# Altium PCB FMC-320U-B0.PcbDoc
Units mil, origin at the board's own origin, x right, y up, seen from the top; angles counter-clockwise.
Board outline 3372.94 x 3385.83 mil, 2 copper layers (Top Layer, Bottom Layer), stack 65.8 mil thick; 25 components, 16 nets, 68 pads, 21 vias.
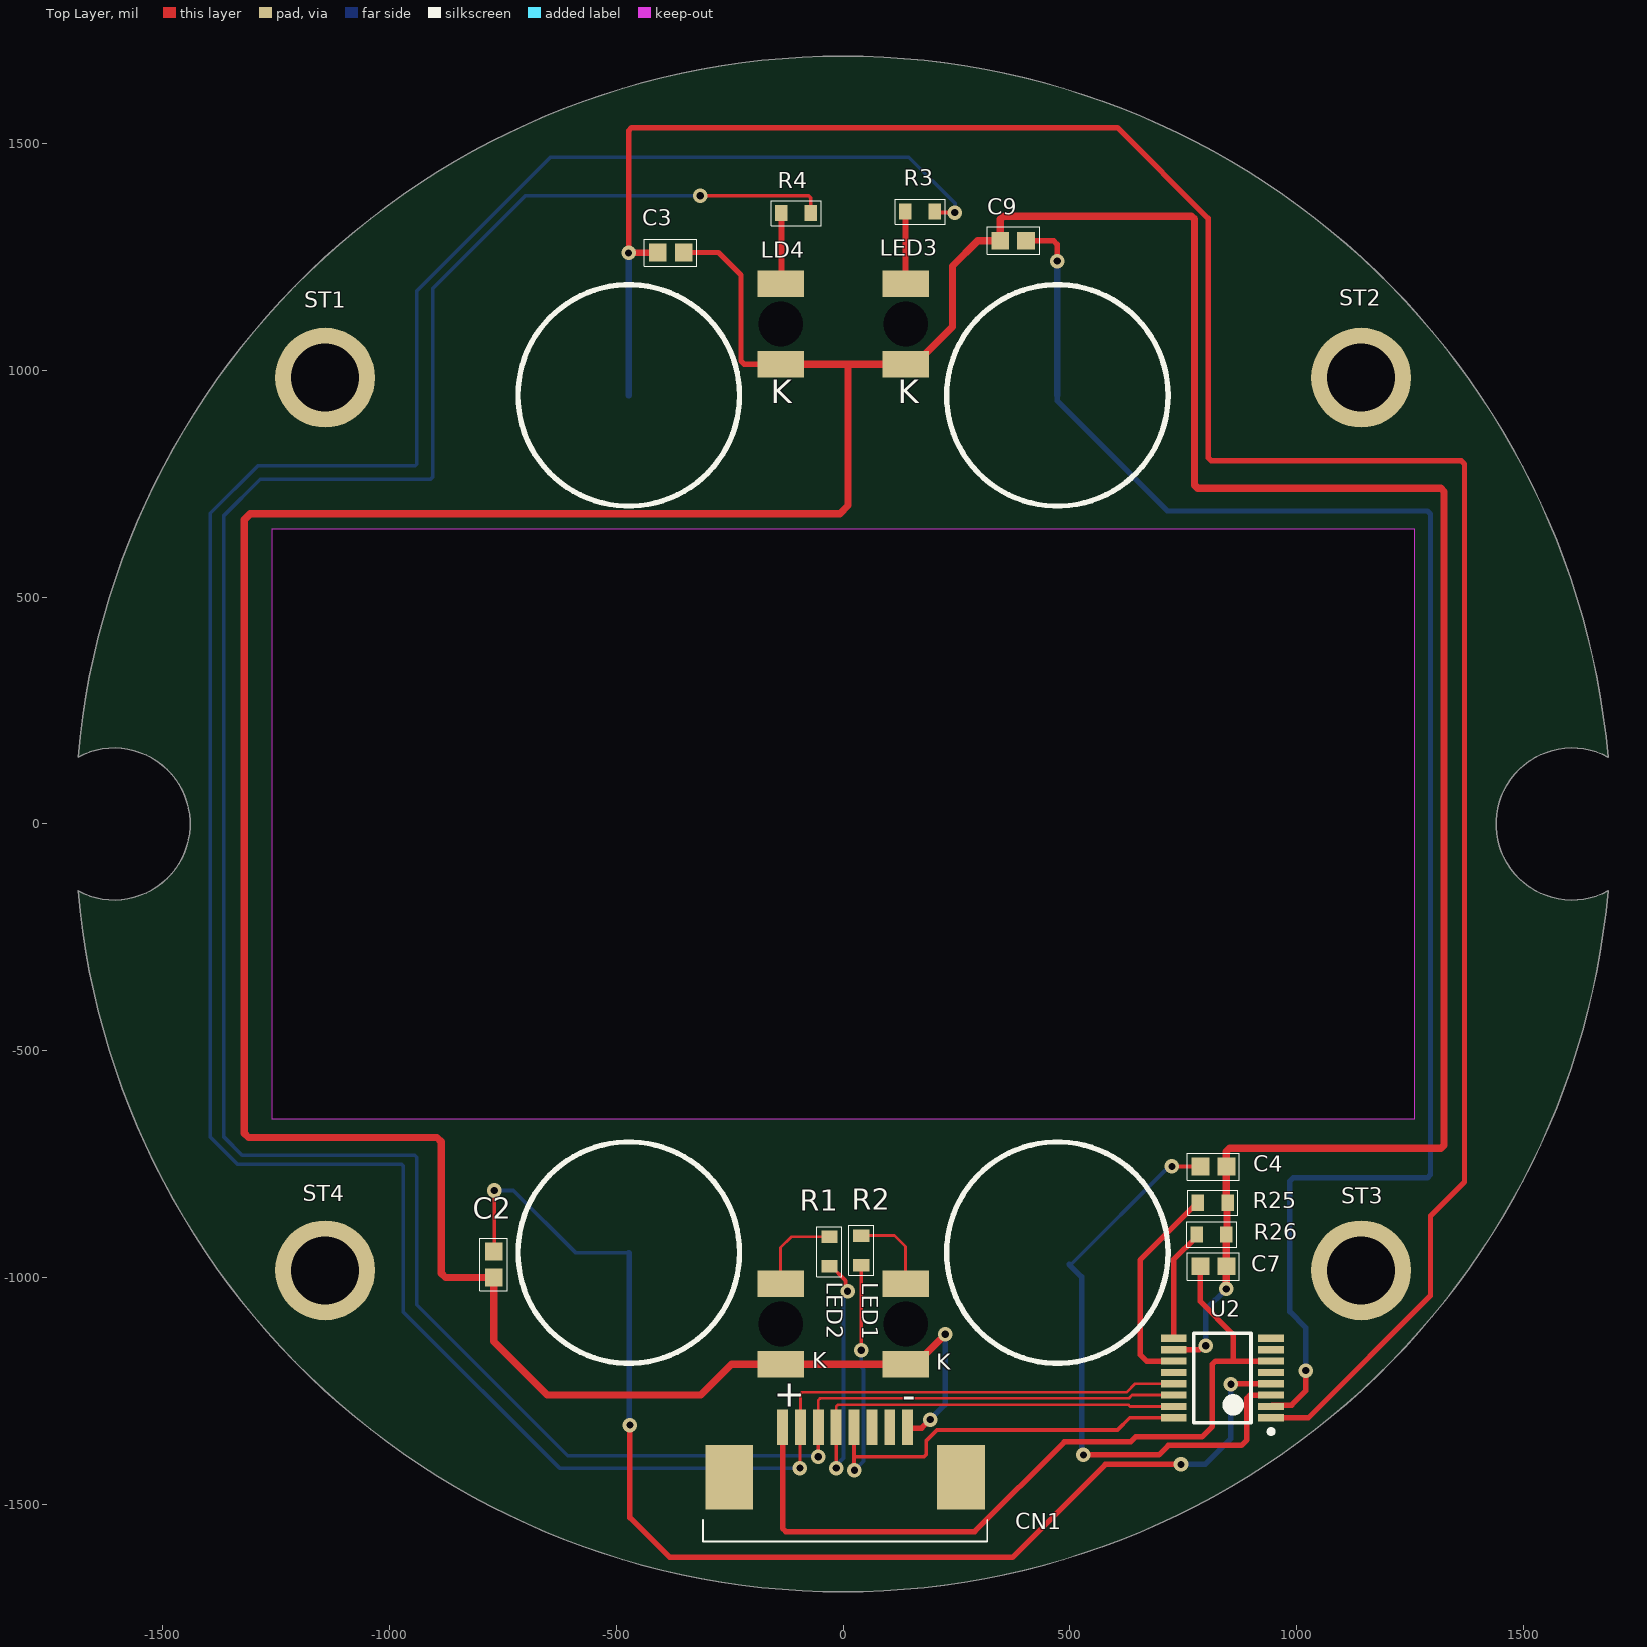
[diagram p0: Top Layer view]
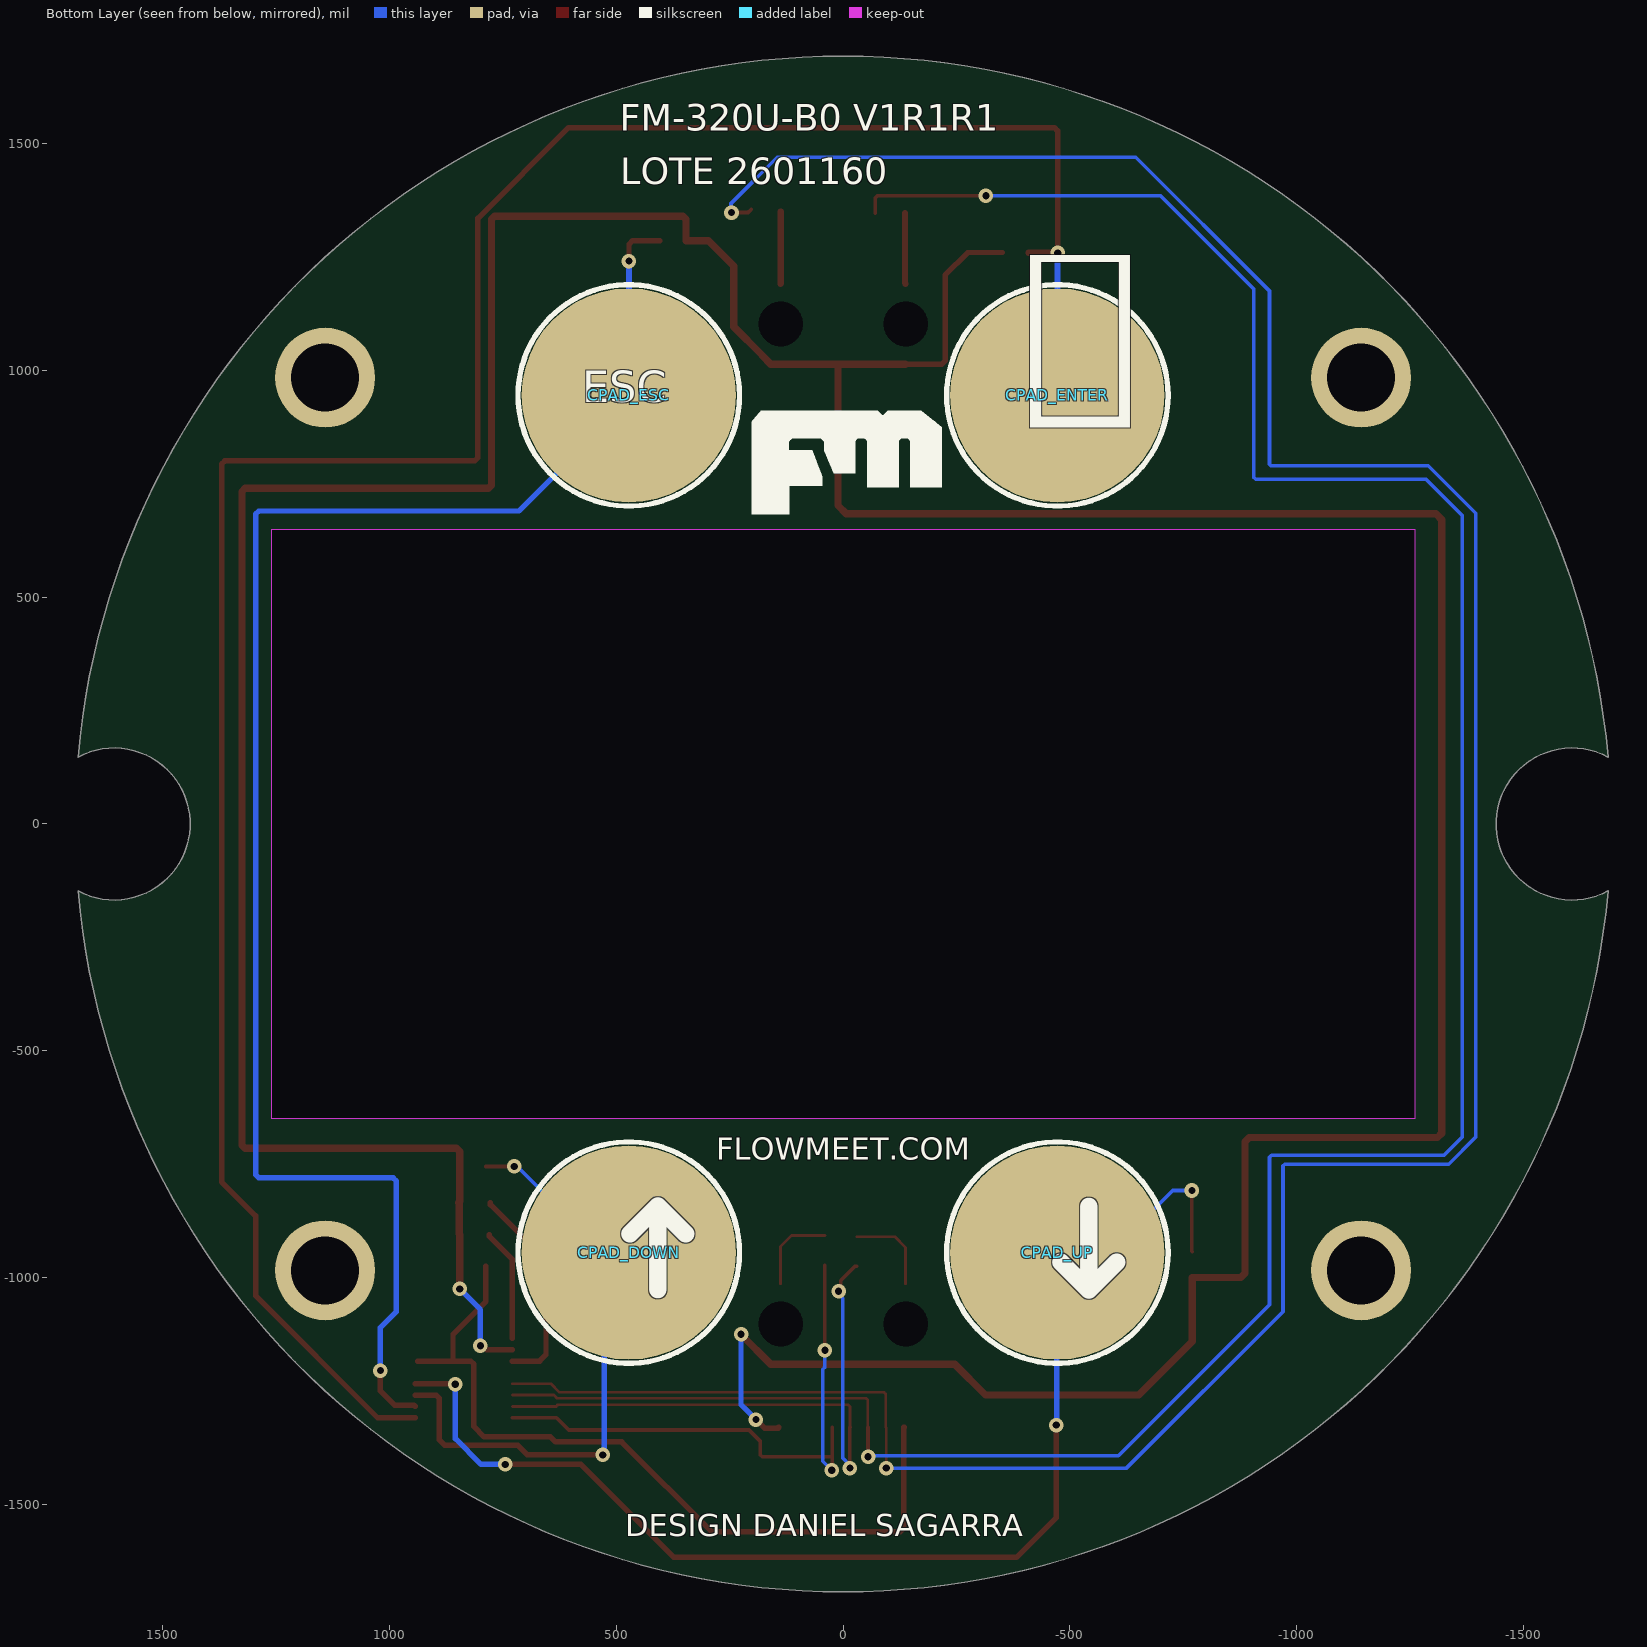
[diagram p1: Bottom Layer view, seen from below]

## Layer stack, top to bottom
Top Solder: solder mask 0.4, Solder Resist, Dk 3.5
Top Layer: signal copper 1.4
Dielectric 1: dielectric 63, FR-4, Dk 4.8
Bottom Layer: signal copper 1.4
Bottom Solder: solder mask 0.4, Solder Resist, Dk 3.5

## Board outline
-1686.47,-147.55 ccw(c0,0) 1686.47,-147.55 cw(c1607,0) 1686.47,147.55 ccw(c0,0) -1686.47,147.55 cw(c-1607,0)
cut-out: -1259.84,649.61 -1259.84,-649.61 1259.84,-649.61 1259.84,649.61

## Design rules (kind name [scope] priority, off if disabled: settings)
BoardOutlineClearance [NOT(InNamedUnion('Manufacturing Notes'))] p1: gap=20 ignorepadtopadclearanceinfootprint=FALSE except(50: SMDPad-OutlineEdge SMDPad-CavityEdge SMDPad-CutoutEdge SMDPad-SplitBarrior SMDPad-SplitContinuation THPad-OutlineEdge THPad-CavityEdge THPad-CutoutEdge THPad-SplitBarrior THPad-SplitContinuation)
Clearance [All] p1: gap=7 ignorepadtopadclearanceinfootprint=FALSE
HoleSize [All] p1: absolutevalues=TRUE maxlimit=236 minlimit=16 maxpercent=80.000 minpercent=20.000
HoleToHoleClearance [All] p1: gap=16 allowstackedmicrovias=TRUE
MinimumSolderMaskSliver [All] p1: minsoldermaskwidth=5
PolygonConnect [All] p1: connectstyle=Relief reliefconductorwidth=16 reliefentries=4 polygonreliefangle="90 Angle" airgapwidth=10
RoutingVias [All] p1: holewidth=16 width=32 viastyle="Through Hole" minholewidth=6 minwidth=12 maxholewidth=236 maxwidth=250
SilkToSolderMaskClearance [IsPad] p1: minsilkscreentomaskgap=6 clearancetoexposedcopper=TRUE
SolderMaskExpansion SolderMaskExpansion_Vias [IsVia] p1: expansion=-16 istentingtop=FALSE
SolderMaskExpansion [All] p2: expansion=2 istentingtop=FALSE
Width [All] p1: maxlimit=20 minlimit=4 preferedwidth=8
26 further rules are at their usual default settings.

## Classes and differential pairs
component class Interboard: CN1 ST1 ST2 ST3 ST4 ST11 ST12 ST13 ST14 W1

## Components (designator, comment, footprint, x,y, rotation, side; value= is the part's Value field where it differs from the comment)
C2 "27pF" CAP_SM0603_YAGEOCC2_N -770,-971.38 r90 top
C3 "27pF" CAP_SM0603_YAGEOCC2_N -380,1260 r180 top
C4 "27pF" CAP_SM0603_YAGEOCC2_N 816.38,-755 r180 top
C7 "100nF" CAP_SM0603_YAGEOCC2_N 816.38,-975 r180 top
C9 "27pF" CAP_SM0603_YAGEOCC2_N 375,1286 r0 top
CN1 "A10FC-S08FCA-H25" 849528 4.49,-1455.75 r0 top
CPAD_DOWN "DOWN" CAPACITIVE_PAD_12MM 472.44,-944.88 r180 bottom
CPAD_ENTER "ENTER" CAPACITIVE_PAD_12MM -472.44,944.88 r90 bottom
CPAD_ESC "ESC" CAPACITIVE_PAD_12MM 472.44,944.88 r180 bottom
CPAD_UP "UP" CAPACITIVE_PAD_12MM -472.44,-944.88 r180 bottom
LD4 "VLRK31R1S2-GS08" VLRK31R1S2GS08 -137.8,1102.36 r90 top
LED1 "VLRK31R1S2-GS08" VLRK31R1S2GS08 -137.8,-1102.36 r90 top
LED2 "VLRK31R1S2-GS08" VLRK31R1S2GS08 137.8,-1102.36 r90 top
LED3 "VLRK31R1S2-GS08" VLRK31R1S2GS08 137.8,1102.36 r90 top
R1 "2K2" RES_SM0603_YAGEORC_N -30,-942.56 r270 top
R2 "2K2" RES_SM0603_YAGEORC_N 40,-940 r270 top
R3 "2K2" RES_SM0603_YAGEORC_N 170,1350 r0 top
R4 "2K2" RES_SM0603_YAGEORC_N -103.56,1347 r0 top
R25 "0" RES_SM0603_YAGEORC_N 815,-835 r180 top
R26 "0" RES_SM0603_YAGEORC_N 812.44,-905 r180 top
ST1 "SMTSOM230BTR" SMTSOM266BTR -1142,984 r0 top
ST2 "SMTSOM230BTR" SMTSOM266BTR 1142,984 r0 top
ST3 "SMTSOM230BTR" SMTSOM266BTR 1142,-984 r0 top
ST4 "SMTSOM230BTR" SMTSOM266BTR -1142,-984 r0 top
U2 "TTP224C-BSBN" SSOP-16 836.28,-1221.5 r180 top

## Footprints (in the part's own frame and the unit in brackets; to place one, negate y for a bottom-side part, rotate by r counter-clockwise, add the part's x,y. Pads: shape width x height; smd on the part's side, far side on the other; paste and mask are expansions set on the pad)
849528 [mm]
  rect 0.61x2 smd: 1(-3.5,3.2) 2(-2.5,3.2) 3(-1.5,3.2) 4(-0.5,3.2) 5(0.5,3.2) 6(1.5,3.2) 7(2.5,3.2) 8(3.5,3.2)
  rect 2.68x3.6 smd: MP1(-6.49,0.4) MP2(6.49,0.4)
  silkscreen extent -7.96,-3.2 7.96,-2, body extent -8.06,-3.11 7.87,3.43, height 2.64
CAP_SM0603_YAGEOCC2_N [mm] "Capacitor, Yageo CC Class2, SM0603, IPC Medium Density"
  rect 1x1 smd: 1(-0.727,0) 2(0.727,0)
  silkscreen extent -1.45,-0.75 1.48,0.77, body extent -0.9,-0.5 0.9,0.5, height 0.9
CAPACITIVE_PAD_12MM [mm]
  round 12 smd mask+0: 1(0,0)
  silkscreen extent -6.2,-6.2 6.2,6.2
RES_SM0603_YAGEORC_N [mm] "Resistor, Yageo RC_L, SM0603, IPC Medium Density"
  rect 0.7x0.9 smd: 1(-0.827,0) 2(0.827,0)
  silkscreen extent -1.4,-0.7 1.4,0.7, body extent -0.85,-0.45 0.85,0.45, height 0.55
SMTSOM266BTR [mm]
  round 5.595 hole 3.81: MH1(0,0)
  body extent -2.78,-2.78 2.78,2.78, height 3.01
SSOP-16 [mil]
  rect 57.09x16 smd paste+0: 1(-107.28,87.5)
  rect 57.09x16 smd: 2(-107.28,62.5) 3(-107.28,37.5) 4(-107.28,12.5) 5(-107.28,-12.5) 6(-107.28,-37.5) 7(-107.28,-62.5) 8(-107.28,-87.5) 9(107.28,-87.5) 10(107.28,-62.5) 11(107.28,-37.5) 12(107.28,-12.5) 13(107.28,12.5) 14(107.28,37.5) 15(107.28,62.5) 16(107.28,87.5)
  silkscreen extent -112,-98 63,123, body extent -118,-98 118,98, height 69
VLRK31R1S2GS08 [mm]
  rect 1.5x2.6 smd: A(2.25,0) K(-2.25,0)
  round 1.25 hole 2.5 unplated: MH1(0,0)
  body extent -1.6,-1.4 1.6,1.4, height 2.2

## Part data
C2 C3 C4 C9: library part CC0603JRNPO9BN270, "CAP 27pF SM0603 NPO 50V YAGEO CC2", Manufacturer=Yageo, Package=0603, Supplier Part Number 1=722017, Tolerance (%)=5, Voltage Rating (Volts)=50, Category=Capacitor, ComponentLink1Description="Manufacturer Website", ComponentLink1URL=http://www.yageo.com, Manufacturer part number=CC0603JRNPO9BN270, Supplier 1=Farnell, Supplier 2=Digi-Key, Supplier Part Number 2=311-1063-1-ND
C7: library part CC0603KRX7R9BB104, "CAP 100nF SM0603 X7R 50V YAGEO CC2", Manufacturer=Yageo, Package=0603, Supplier Part Number 1=1362556, Tolerance (%)=10, Voltage Rating (Volts)=50, Category=Capacitor, ComponentLink1Description="Manufacturer Website", ComponentLink1URL=http://www.yageo.com, Datasheet=https://datasheet.lcsc.com/lcsc/2211101700_YAGEO-CC0603KRX7R9BB104_C14663.pdf, Manufacturer part number=CC0603KRX7R9BB104, Supplier 1=Farnell, Supplier 2=Digi-Key, Supplier Part Number 2=311-1344-1-ND
CN1: "FFC/FPC Connector 8 Position 1mm Pitch Bottom Contact Surface Mount, Right Angle -40℃~+85℃", Manufacturer=JXTCONN, Vendor Part Number=C42447839, Manufacturer part number=A10FC-S08FCA-H25, Price=0.089, Vendor=LCSC
CPAD_DOWN CPAD_ENTER CPAD_ESC CPAD_UP: library part CAPACITIVE_PAD_12MM, CHN-Manufacturer PartNumber=H146, CHN-Unit Price=$0.7300, ComponentLink1Description=AliExpress, ComponentLink1URL=https://es.aliexpress.com/item/1005004527423869.html?spm=a2g0o.detail.1000014.16.502e32205VZBuG&gps-id=pcDetailBottomMoreOtherSeller&scm=1007.40000.267768.0&scm_id=1007.40000.267768.0&scm-url=1007.40000.267768.0&pvid=72c520e2-f2a8-461d-97e7-b7d30736c04e&_t=gps-id:pcDetailBottomMoreOtherSeller,scm-url:1007.40000.267768.0,pvid:72c520e2-f2a8-461d-97e7-b7d30736c04e,tpp_buckets:668%232846%238110%23313&pdp_ext_f=%7B%22sku_id%22%3A%2212000029483215674%22%2C%22sceneId%22%3A%2230050%22%7D&pdp_npi=2%40dis%21ARS%2160.66%2154.6%21%21%21%21%21%40210323a216660255258725316e1a7a%2112000029483215674%21rec, Type=thru-hole
LD4 LED1 LED2 LED3: "Red 630nm LED Indication - Discrete 2.1V 2-SMD, Z-Bend", Manufacturer=Vishay, Manufacturer part number=VLRK31R1S2-GS08
R1 R2 R3 R4: library part RC0603FR-072K2L, "RES 2K2 SM0603 YAGEO RC_L", Manufacturer=Yageo, Package=0603, Power (Watts)=0.1, Resistance (Ohms)=2200, Supplier Part Number 1=9238522, Tolerance (%)=1, Category=Resistor, ComponentLink1Description="Manufacturer Website", ComponentLink1URL=http://www.yageo.com, Manufacturer part number=RC0603FR-072K2L, Supplier 1=Farnell, Supplier 2=Digi-Key, Supplier Part Number 2=311-2.20KHRCT-ND
R25 R26: library part RC0603FR-070RL, "RES 0 OHMS SM0603 YAGEO RC_L", Manufacturer=Yageo, Package=0603, Power (Watts)=0.1, Supplier Part Number 1=9238484, Tolerance (%)=1, Category=Resistor, ComponentLink1Description="Manufacturer Website", ComponentLink1URL=http://www.yageo.com, Datasheet=https://www.yageo.com/upload/media/product/app/datasheet/rchip/pyu-rc_group_51_rohs_l.pdf, Manufacturer part number=RC0603FR-070RL, Resistance (Ohms)=0, Supplier 1=Farnell, Supplier 2=Digi-Key, Supplier Part Number 2=311-1.00KHRCT-ND
ST1 ST2 ST3 ST4: "Standoffs & Spacers SURFACE MOUNT STANDOFF", Manufacturer=Yiyuan, Vendor Part Number=C5221851, Manufacturer part number=SMTSOM230BTR, Price=0.0652, Vendor=LCSC
U2: "SSOP-16 Touch Screen Controllers ROHS", Manufacturer="Tontek Design Tech", Vendor Part Number=C2890350, Manufacturer part number=TTP224C-BSBN, Price=0.2692, Vendor=LCSC

## Via types
v1: diameter 32, hole 16, Top Layer to Bottom Layer, 21 vias

## Nets (pads, with @x,y where several pads share a name; then routed paths per layer and width w, separated by ;. In a path a pad name is that pad's centre, name@x,y a point inside that pad or via, vN(x,y) a via of type N, cw(c..) or ccw(c..) an arc to the next point about the centre after c; other vN are vias at no path point)
CPAD_DOWN: C4.2 CPAD_DOWN.1 U2.3 | length 1334.3
  Top Layer w8: v1(725,-755) C4.2
  Top Layer w12: v1(530,-1391) 696.19,-1391 717.19,-1370 877.97,-1370 890,-1357.97 890,-1266.03 897.03,-1259 U2.3
  Bottom Layer w8: CPAD_DOWN.1@498.31,-970.75 502.76,-970.75 718.51,-755 v1(725,-755)
  Bottom Layer w12: CPAD_DOWN.1@498.31,-970.75 526.17,-998.61 526.17,-1387.17 v1(530,-1391)
CPAD_ENTER: C3.2 CPAD_ENTER.1 U2.1 | length 5437.6
  Top Layer w12: v1(-473,1259) -473,1527.97 -465.97,1535 605,1535 805,1335 805,807.65 812.03,800.62 1362.97,800.62 1370,793.59 1370,-788.85 1295,-863.85 1295,-1040 1026,-1309 U2.1
  Top Layer w13.5: v1(-473,1259) -472.5,1259.5 -409.12,1259.5 C3.2
  Bottom Layer w13.5: v1(-473,1259) -472.44,1258.44 CPAD_ENTER.1
CPAD_ESC: C9.2 CPAD_ESC.1 U2.2 | length 3683
  Top Layer w12: C9.2 464,1286 472,1278 v1(472,1241) ; U2.2 946.43,-1281.14 988.86,-1281.14 1020,-1250 v1(1020,-1205)
  Bottom Layer w12: CPAD_ESC.1@472.22,945.1 472.22,932.78 715,690 1287.97,690 1295,682.97 1295,-772.97 1287.97,-780 992.03,-780 985,-787.03 985,-1075 1020,-1110 v1(1020,-1205)
  Bottom Layer w13.5: v1(472,1241) 472.22,1240.78 CPAD_ESC.1@472.22,945.1
CPAD_UP: C2.2 CPAD_UP.1 U2.4 | length 2752.5
  Top Layer w8: C2.2 -769,-941.76 v1(-769,-808)
  Top Layer w12: v1(-470,-1325) -470,-1529 -382,-1617 373,-1617 578,-1412 v1(745,-1412) ; v1(855,-1235) 855.5,-1234.5 943.07,-1234.5 U2.4
  Bottom Layer w8: v1(-769,-808) -727,-808 -590.12,-944.88 CPAD_UP.1
  Bottom Layer w12: CPAD_UP.1 -471.22,-946.1 -471.22,-1323.78 v1(-470,-1325) ; v1(745,-1412) 798,-1412 855,-1355 v1(855,-1235)
DVDD: C7.2 CN1.1 U2.6 | length 1771.3
  Top Layer w12: CN1.1 -134.76,-1329.76 -135,-1330 -133.31,-1331.69 -133.31,-1552.97 -126.28,-1560 290,-1560 488,-1362 634.06,-1362 645.06,-1351 791.11,-1351 814.14,-1327.97 814.14,-1191.03 821.17,-1184 860,-1184 U2.6@937.85,-1184 ; C7.2 787.76,-1052.76 860,-1125 860,-1180.86
GND: C2.1 C3.1 C4.1 C7.1 C9.1 CN1.8 LD4.K LED1.K LED2.K LED3.K R25.1 R26.1 U2.10 | length 10537.6
  Top Layer w12: C3.1 -275,1260 -225,1210 -225,1020.81 -217.97,1013.78 LD4.K ; CN1.8 143,-1330.48 143,-1332 173,-1332 v1(192,-1313) ; U2.10 785.5,-1159 794.04,-1150.46 v1(799.45,-1150.46)
  Top Layer w16: LD4.K 11,1013.78 ; v1(225,-1125) 225,-1125.39 159.45,-1190.94 LED1.K -245.94,-1190.94 -314,-1259 -652,-1259 -770,-1141 C2.1 -876.63,-1000 -886,-990.63 -886,-700.37 -895.37,-691 -1310.63,-691 -1320,-681.63 -1320,671 -1307,684 -7,684 11,702 11,1013.78 ; v1(845,-1025) R26.1 846.28,-903.72 846.28,-836.28 R25.1 845,-832.44 C4.1 845,-722.03 852.03,-715 1317.97,-715 1325,-707.97 1325,732.97 1317.97,740 782.03,740 775,747.03 775,1332.97 767.97,1340 353.41,1340 346.38,1332.97 C9.1 296.72,1286 241,1230.28 241,1096 178.98,1033.98 178.98,1033.31 159.45,1013.78 LED3.K 11,1013.78
  Bottom Layer w12: v1(192,-1313) 225,-1280 v1(225,-1125) ; v1(799.45,-1150.46) 799.45,-1070.55 v1(845,-1025)
LED_DOWN: LED2.A R2.1 | length 189.9
  Top Layer w6: R2.1 113.44,-907.44 137.8,-931.8 LED2.A
LED_ENTER: LD4.A R4.1 | length 156.7
  Top Layer w13.5: LD4.A -136.12,1192.62 R4.1
LED_ESC: LED3.A R3.1 | length 159.2
  Top Layer w13.5: R3.1 137.44,1191.3 LED3.A
LED_UP: LED1.A R1.1 | length 197.6
  Top Layer w6: LED1.A -137.8,-933.8 -114,-910 R1.1
NetR25_2: R25.2 U2.11 | length 465.5
  Top Layer w12: U2.11 669,-1184 655,-1170 655,-961.38 777.44,-838.94 R25.2@777.44,-835
NetR26_2: R26.2 U2.9 | length 250.1
  Top Layer w12: U2.9 729,-959.82 779.88,-908.94 R26.2
OUT_DOWN: CN1.5 R2.2 U2.16 | length 1316.5
  Top Layer w8: CN1.5 24.17,-1395 ; v1(25,-1425) 24.17,-1424.17 24.17,-1395 ; v1(40,-1159.94) R2.2 ; U2.16 632,-1309 605,-1336 207.18,-1336 183,-1360.18 183,-1390.31 178.31,-1395 24.17,-1395
  Bottom Layer w8: v1(25,-1425) 45,-1405 45,-1202 40,-1197 v1(40,-1159.94)
OUT_ENTER: CN1.3 R4.2 U2.14 | length 5940.3
  Top Layer w6: CN1.3 -54.57,-1270.18 -50.39,-1266 630.38,-1266 637.38,-1259 U2.14
  Top Layer w8: v1(-315,1385) -75.69,1385 -71,1380.31 R4.2 ; v1(-55,-1395) -55,-1330.2 CN1.3
  Bottom Layer w8: v1(-315,1385) -700,1385 -905,1180 -905,764.69 -909.69,760 -1285,760 -1365,680 -1365,-690 -1325,-730 -944.69,-730 -940,-734.69 -940,-1060 -607,-1393 -57,-1393 v1(-55,-1395)
OUT_ESC: CN1.2 R3.2 U2.13 | length 6461.5
  Top Layer w6: v1(-95,-1420) -95,-1330.83 CN1.2 -93.94,-1256.51 -90.42,-1253 625,-1253 644,-1234 U2.13
  Top Layer w8: R3.2@202.56,1354.96 209.52,1348 v1(246,1348)
  Bottom Layer w8: v1(-95,-1420) -625,-1420 -970,-1075 -970,-753.51 -973.51,-750 -1335,-750 -1395,-690 -1395,685 -1290,790 -943.51,790 -940,793.51 -940,1175 -645,1470 145,1470 247,1368 247,1349 v1(246,1348)
OUT_UP: CN1.4 R1.2 U2.15 | length 1357
  Top Layer w6: CN1.4 -15.2,-1284.62 -10.97,-1280.39 628.98,-1280.39 632.59,-1284 U2.15
  Top Layer w8: R1.2 -26.06,-975.12 5.41,-1006.59 5.41,-1025.41 v1(10,-1030) ; CN1.4 -15,-1329.96 v1(-15,-1420)
  Bottom Layer w8: v1(-15,-1420) -15,-1413.51 0.91,-1397.6 0.91,-1045.59 10,-1036.49 v1(10,-1030)
pads on no net: CN1.6 CN1.7 CN1.MP1 CN1.MP2 LD4.MH1 LED1.MH1 LED2.MH1 LED3.MH1 ST1.MH1 ST2.MH1 ST3.MH1 ST4.MH1 U2.5 U2.7 U2.8 U2.12

## Silkscreen, mask and mechanical layers (free items; w line width, h text height)
Top Overlay:
  text "+" at -153,-1285 h60
  text "-" at 130,-1288.99 h60
Bottom Overlay:
  region: 841 vertices and 0 holes, not listed, extent -217.84,682.76 201.78,910.92
  text "FM-320U-B0 V1R1R1" at 492.19,1528.81 h59.06
  text "LOTE 2601160" at 491.19,1410.81 h59.06
  text "⤶" at -390.55,840 h590.55
  text "FLOWMEET.COM" at 280.16,-740.16 h49.21
  text "➜" at -368.7,-805.99 h393.7 r90
  text "➜" at 582.17,-1064.09 h393.7 r90
  text "DESIGN DANIEL SAGARRA" at 480,-1570 h49.21
Mechanical 13:
  the board outline again, w10

## Text inside footprints (layer, text, board x,y; h text height)
LD4: Top Overlay "K" at -160,910 h90
LED1: Top Overlay "K" at -67.5,-1211.5 h60
LED2: Top Overlay "K" at 205,-1215 h60
LED3: Top Overlay "K" at 120,910 h90